# EAGLE board mainV1.0 (EAGLE 8.6.0)
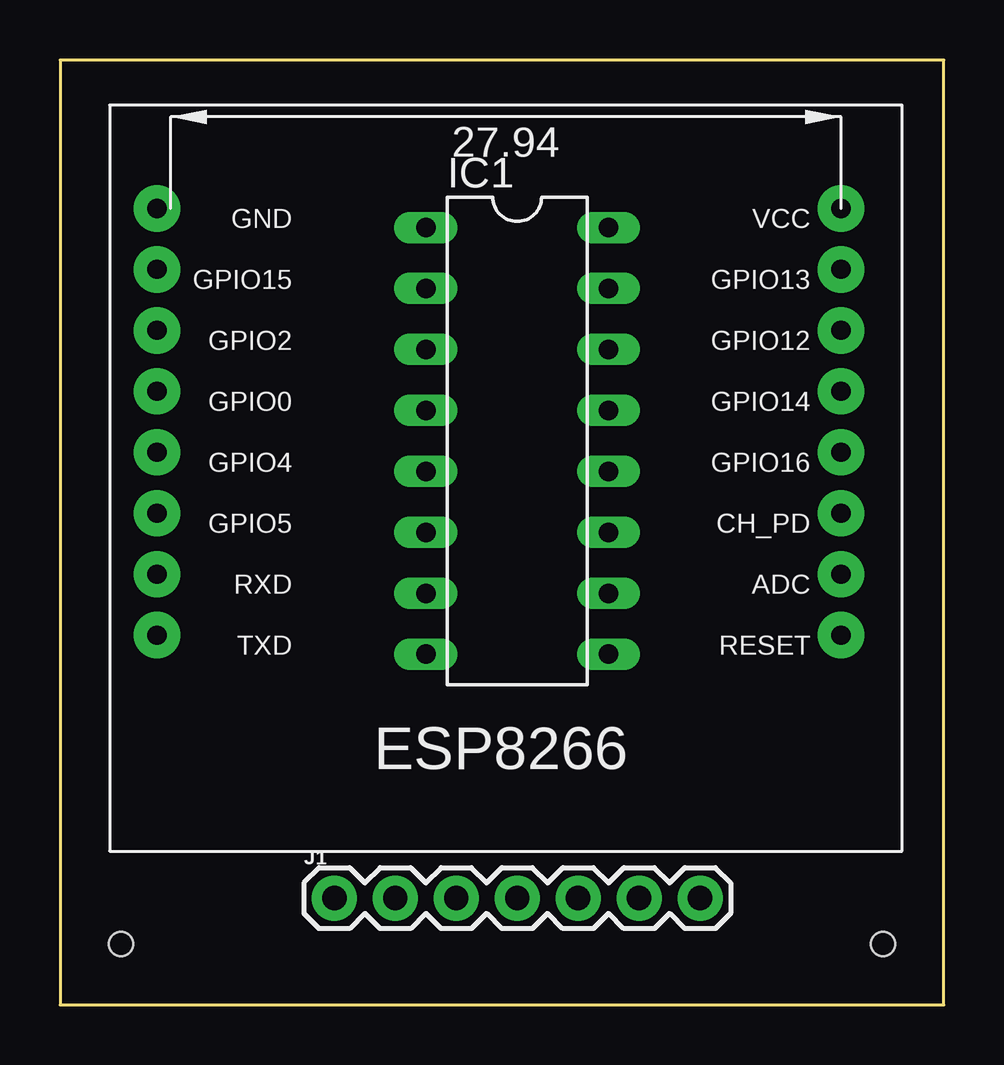
[diagram p0: board, top side]
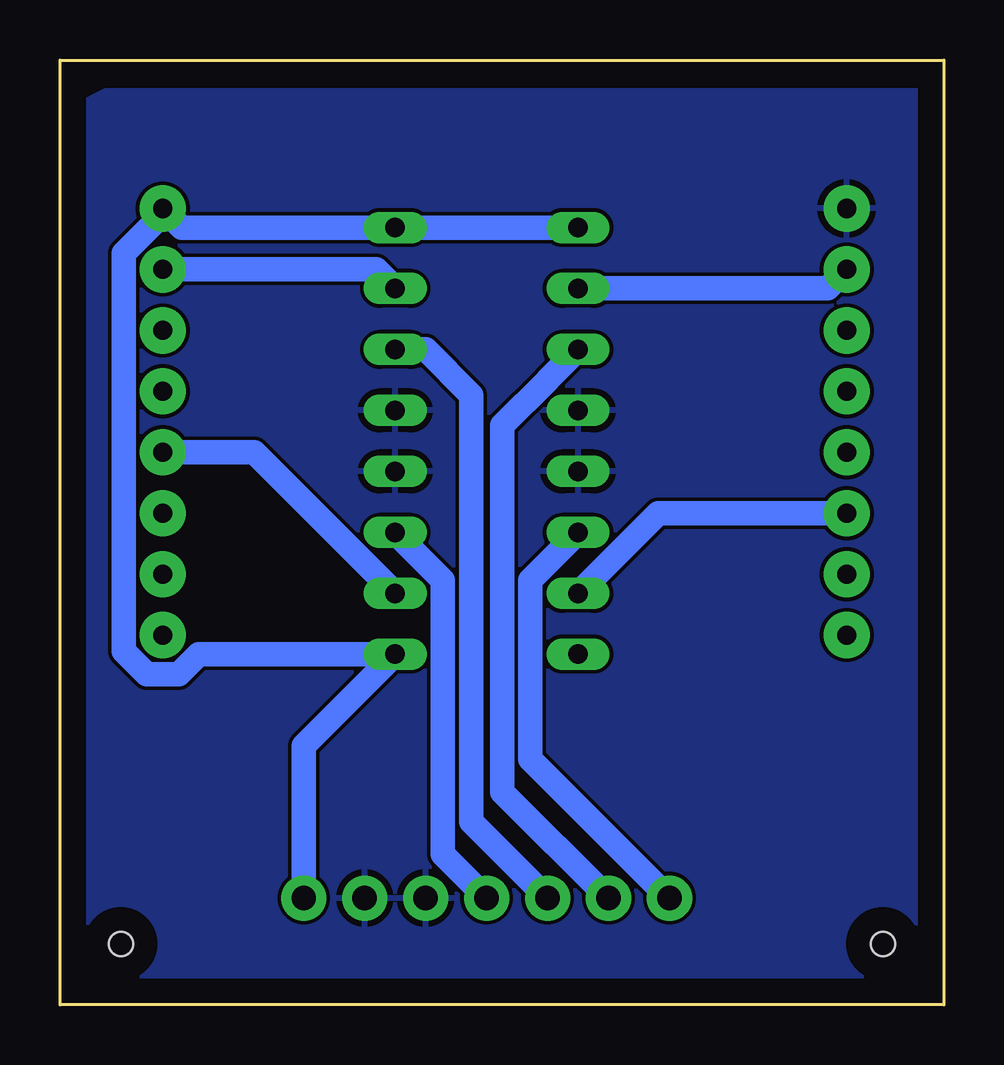
[diagram p1: board, bottom side, seen from below]

Size 36.83 x 39.36 mm. Coordinates in mm from the lower left corner, seen from the top.
Outline: 0,0 36.83,0 36.83,39.36 0,39.36 0,0
Copper layers (1*16): Top 0.035mm / dielectric 1.5mm / Bottom 0.035mm
Design rules "default": minimum track width 6mil, minimum drill 0.35mm, track to track 6mil, track to pad 6mil, pad to pad 6mil, via to via 6mil, smd to smd 6mil, copper to edge 40mil, drill to drill 6mil, minimum pad ring 10mil, minimum via ring 8mil, stop-mask expansion 4mil, vias tented up to drill 0mil, thermal gap 10mil
Holes 1 mm at 34.29,2.54 2.54,2.54

## Footprints (pad centres in the part's own frame; a part is rotated, then mirrored left to right if it is on the bottom)
DIL16 = drill 0.813 long: 1 -8.89,-3.81; 2 -6.35,-3.81; 3 -3.81,-3.81; 4 -1.27,-3.81; 5 1.27,-3.81; 6 3.81,-3.81; 7 6.35,-3.81; 8 8.89,-3.81; 9 8.89,3.81; 10 6.35,3.81; 11 3.81,3.81; 12 1.27,3.81; 13 -1.27,3.81; 14 -3.81,3.81; 15 -6.35,3.81; 16 -8.89,3.81
1X07 = drill 1.016 pad 1.88: 1 0,0; 2 2.54,0; 3 5.08,0; 4 7.62,0; 5 10.16,0; 6 12.7,0; 7 15.24,0
ESP_THIAGO = drill 0.8 pad 1.93: P$1 0,17.78; P$2 0,15.24; P$3 0,12.7; P$4 0,10.16; P$5 0,7.62; P$6 0,5.08; P$7 0,2.54; P$8 0,0; P$9 28.5,0; P$10 28.5,2.54; P$11 28.5,5.08; P$12 28.5,7.62; P$13 28.5,10.16; P$14 28.5,12.7; P$15 28.5,15.24; P$16 28.5,17.78

## Placement (x,y rotation side)
IC1  L293D  [DIL16]  19.05,23.5 270 top
J1  [1X07]  11.43,4.45 0 top
U$1  ESP_THIAGO  [ESP_THIAGO]  32.55,33.18 180 top

## Library data of the parts
IC1 = st-microelectronics; MPN: L293D; OC_FARNELL: 9589619; OC_NEWARK: 56P8249
J1 = SparkFun-Connectors
U$1 = esp8266

## Nets
GND: IC1.4 IC1.5 IC1.12 IC1.13 J1.5 J1.6 U$1.P$9
GPIO5: IC1.7 U$1.P$14
GPIO13: IC1.15 U$1.P$7
GPIO15: IC1.2 U$1.P$10
GPIO16: IC1.10 U$1.P$4
M1: IC1.3 J1.2
M2: IC1.6 J1.1
M3: IC1.11 J1.4
M4: IC1.14 J1.3
VCC: IC1.1 IC1.9 IC1.16 J1.7 U$1.P$8
VCC2: IC1.8

## Tracks (layer width: path | path; a pad name or v marks a point on that pad's centre or on a via)
GND
  pour Bottom: 0.64,38.1 0.64,1.91 1.91,0.64 34.93,0.64 36.2,1.91 36.2,37.46 34.93,38.1
GPIO5
  Bottom 1.016: U$1.P$14 11.9,20.48 IC1.7
GPIO13
  Bottom 1.016: IC1.15 23.66,30.64 U$1.P$7
GPIO15
  Bottom 1.016: U$1.P$10 4.84,29.85 IC1.2
GPIO16
  Bottom 1.016: IC1.10 28.73,23.02 U$1.P$4
M1
  Bottom 1.016: J1.2 18.39,8.87 18.39,24.14 16.51,26.02 16.51,26.04 IC1.3
M2
  Bottom 1.016: J1.1 17.22,10.24 17.22,17.69 15.88,19.04 15.88,19.05 IC1.6
M3
  Bottom 1.016: IC1.11 22.86,19.67 20.88,17.69 20.88,6.27 J1.4
M4
  Bottom 1.016: J1.3 19.68,7.62 19.68,25.4 21.59,27.31 IC1.14
VCC
  Bottom 1.016: J1.7 26.67,10.79 IC1.9 31.04,14.61 31.87,13.77 33.22,13.77 34.17,14.73 34.17,31.31 32.55,32.94 U$1.P$8 31.75,32.38 IC1.16 IC1.1